# Altium PCB 最小系统.PcbDoc
Units mil, origin at the board's own origin, x right, y up, seen from the top; angles counter-clockwise.
Board outline 6000 x 4000 mil, 2 copper layers (Top Layer, Bottom Layer); 29 components, 12 nets, 110 pads, 0 vias.
Unrouted connection lines stored in the file: 1.
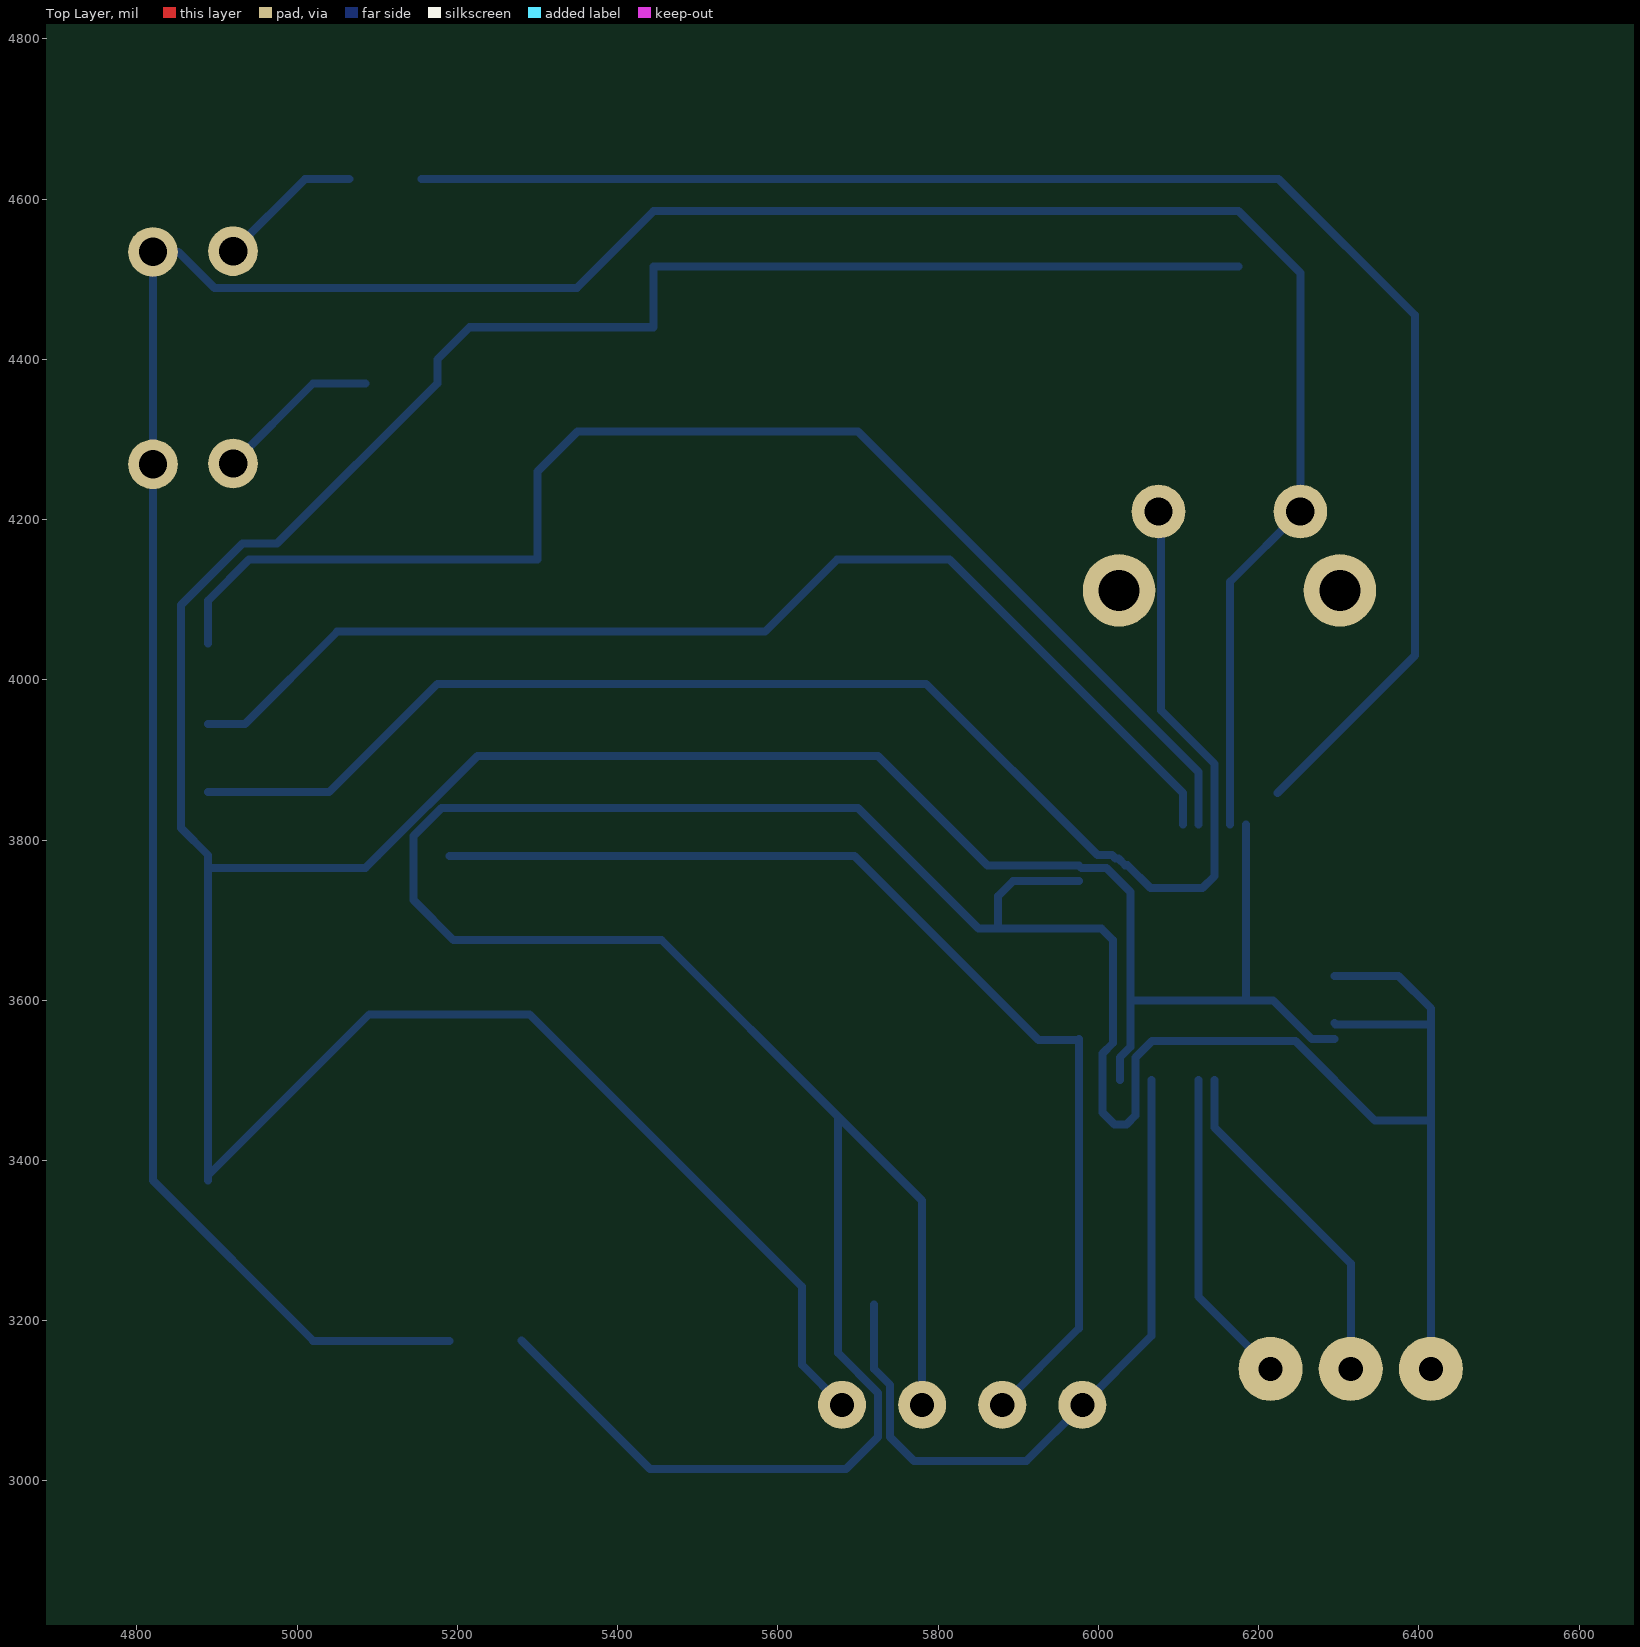
[diagram p0: Top Layer view]
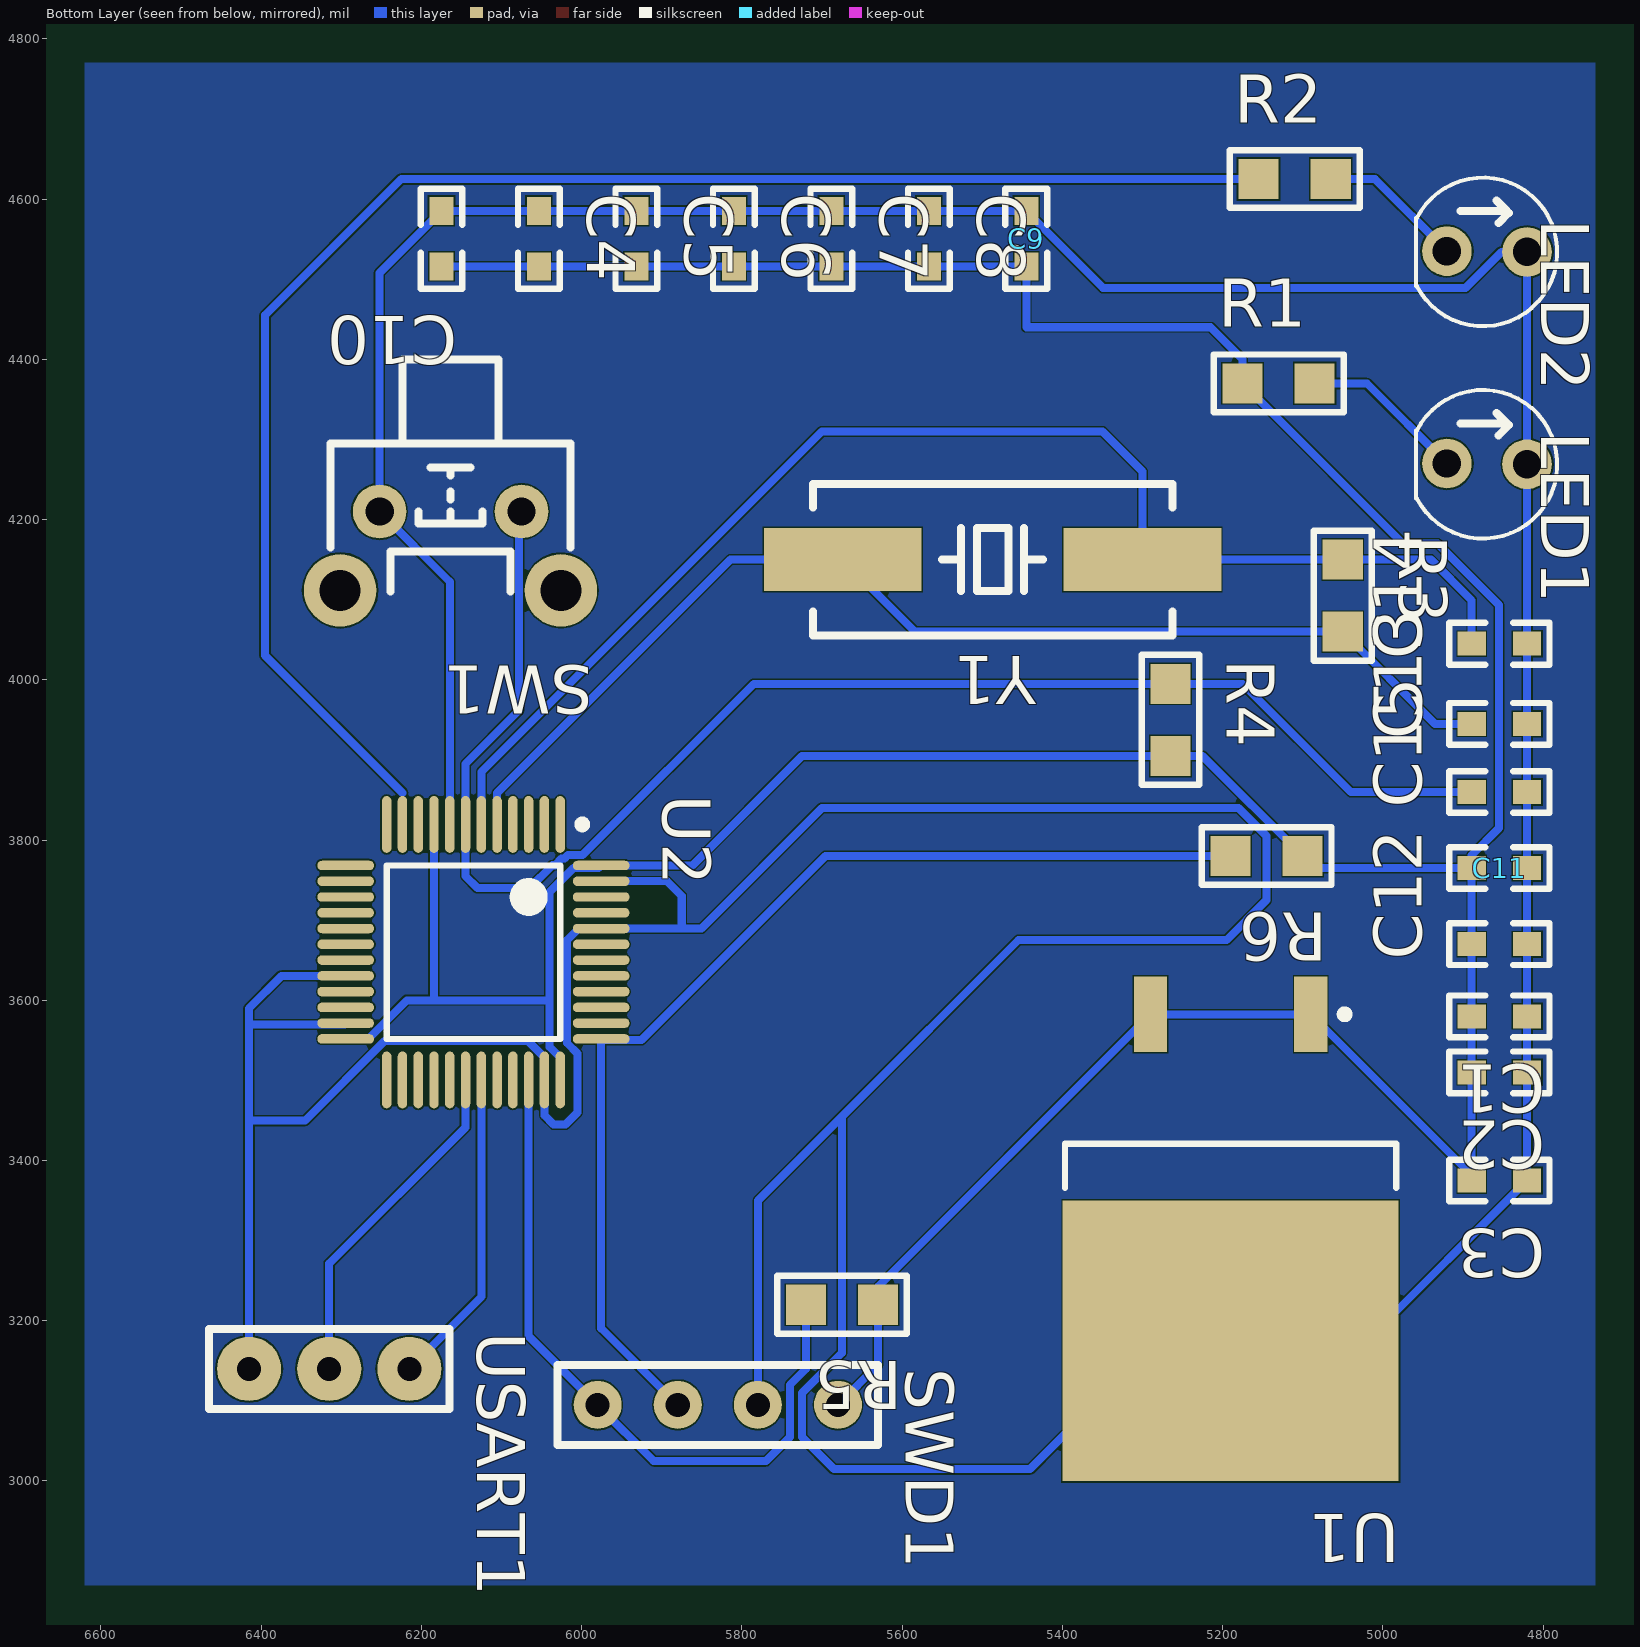
[diagram p1: Bottom Layer view, seen from below]
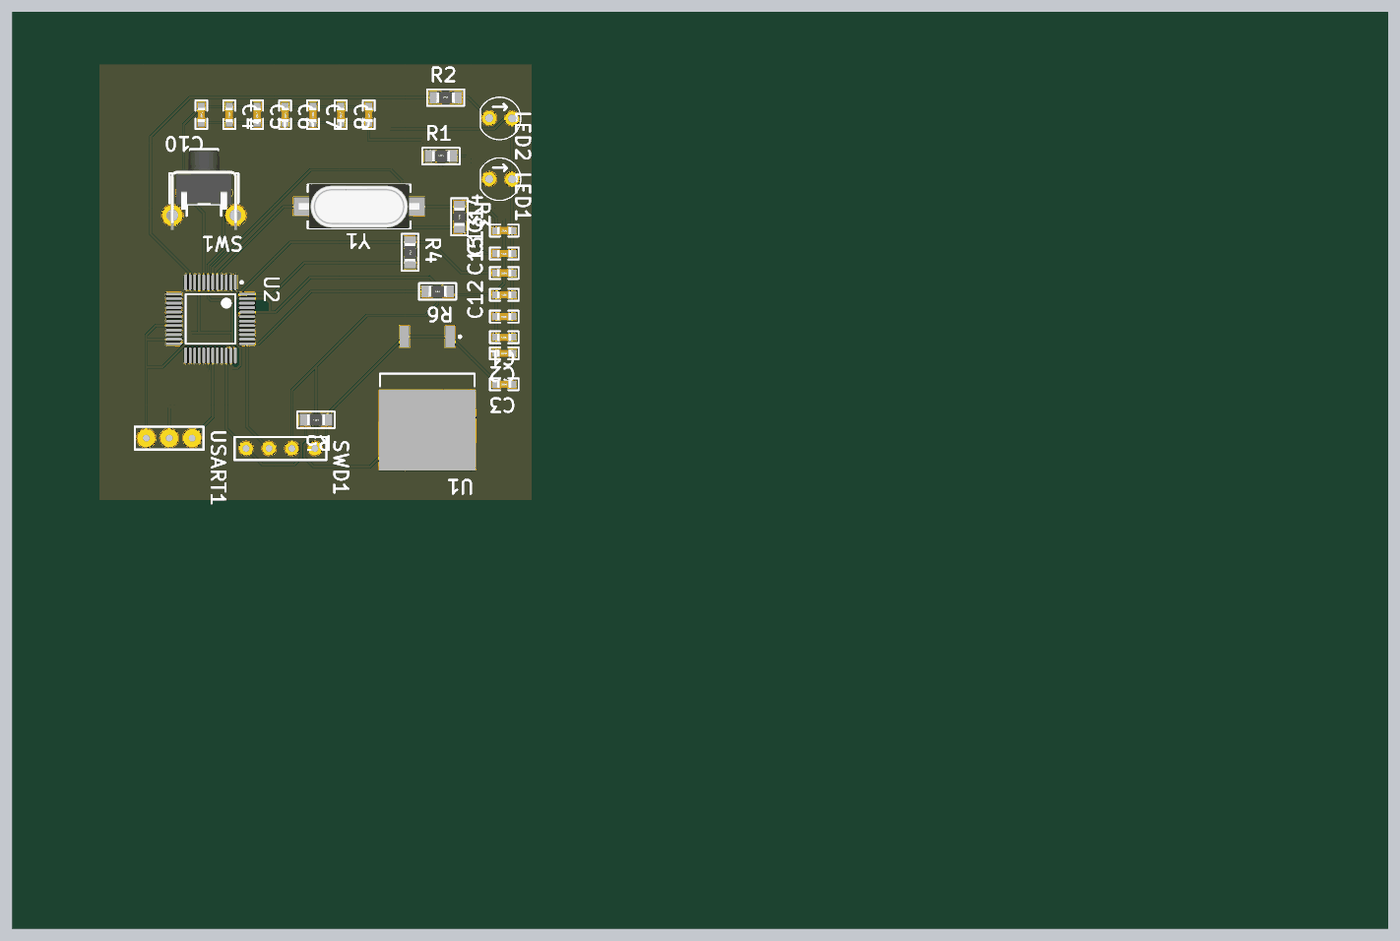
[diagram p2: 3D render of the assembled board from below, using the file's embedded part models]

## Layer stack, top to bottom
Top Solder: solder mask 0.4, Solder Resist, Dk 3.5
Top Layer: signal copper 1.4
Dielectric 1: dielectric 12.6, FR-4, Dk 4.8
Bottom Layer: signal copper 1.4
Bottom Solder: solder mask 0.4, Solder Resist, Dk 3.5

## Board outline
1000,1000 7000,1000 7000,5000 1000,5000

## Design rules (kind name [scope] priority, off if disabled: settings)
Clearance [All] p1: gap=2
PolygonConnect [All] p1: connectstyle=Relief reliefconductorwidth=10 reliefentries=4 polygonreliefangle="90 Angle" airgapwidth=10
RoutingVias [All] p1: holewidth=28 width=50 viastyle="Through Hole" minholewidth=28 minwidth=50 maxholewidth=28 maxwidth=50
SolderMaskExpansion [All] p1: expansion=4
Width [All] p1: maxlimit=10 minlimit=10 preferedwidth=10
30 further rules are at their usual default settings.

## Components (designator, comment, footprint, x,y, rotation, side; value= is the part's Value field where it differs from the comment)
C1 "104" "C 0603" 4855,3580 r0 bottom
C2 "104" "C 0603" 4855,3510 r0 bottom
C3 "104" "C 0603" 4855,3375 r0 bottom
C4 "104" "C 0603" 6053.33,4550 r270 bottom
C5 "104" "C 0603" 5931.67,4550 r270 bottom
C6 "104" "C 0603" 5810,4550 r270 bottom
C7 "104" "C 0603" 5688.33,4550 r270 bottom
C8 "104" "C 0603" 5566.67,4550 r270 bottom
C9 "104" "C 0603" 5445,4550 r270 bottom
C10 "104" "C 0603" 6175,4550 r270 bottom
C11 "104" "C 0603" 4855,3765 r0 bottom
C12 "104" "C 0603" 4855,3670 r0 bottom
C13 "104" "C 0603" 4855,3945 r0 bottom
C14 "104" "C 0603" 4855,4045 r0 bottom
C15 "104" "C 0603" 4855,3860 r0 bottom
LED1 "红色" LED 4920,4270 r180 bottom
LED2 "红色" LED 4920,4535 r180 bottom
R1 "1K" "R 0805" 5130,4370 r180 bottom
R2 "1K" "R 0805" 5110,4625 r180 bottom
R3 "1M" "R 0805" 5050,4105 r270 bottom
R4 "1K" "R 0805" 5265,3950 r270 bottom
R5 "1M" "R 0805" 5675,3220 r0 bottom
R6 "1M" "R 0805" 5145,3780 r0 bottom
SW1 "6x6x5" "TSW DIP-6*6*6_V" 6163.58,4210 r0 bottom
SWD1 "SWD" PCBComponent_1 6480,3195 r270 bottom
U1 "Volt Reg" D2PAK_N 5190,3314.76 r270 bottom
U2 "STM32F103C8T6" LQFP48_N 6135,3660 r270 bottom
USART1 "USART1" header3 6415,3140 r180 bottom
Y1 "XTAL" "XTAL-49S SMD" 5487.01,4150 r0 bottom

## Footprints (in the part's own frame and the unit in brackets; to place one, negate y for a bottom-side part, rotate by r counter-clockwise, add the part's x,y. Pads: shape width x height; smd on the part's side, far side on the other; paste and mask are expansions set on the pad)
"C 0603" [mil] "无极性贴片电容"
  rect 35x30 smd: 1(-35,0) 2(34,0)
  silkscreen extent -63,-26 62,26, body extent -31,-16 31,16, height 32
D2PAK_N [mm] "D2-PAK, 4-Leads, Body 8.8x10.4mm, Pitch 2.54mm, Lead Span 15.1mm, IPC Medium Density"
  rect 2.4x1.05 smd: 1(-6.8,2.54) 3(-6.8,-2.54)
  rect 8.9x10.65 smd: 2(3.55,0)
  silkscreen extent -6.92,-5.25 -1.3,5.25, body extent -2.7,-5.28 6.3,5.28, height 4.69
header3 [mil]
  round 80 hole 30: 1(0,0) 2(100,0) 3(200,0)
  silkscreen extent -50,-50 250,50
LED [mil]
  round 62 hole 35.43: 1(0,0) 2(100,-1)
  silkscreen extent -38,-94 138,92
LQFP48_N [mm] "Thin QFP, 48-Leads, Body 7x7mm, Pitch 0.5mm, IPC Medium Density"
  oval 1.8x0.3 smd: 1(-4.05,2.75) 2(-4.05,2.25) 3(-4.05,1.75) 4(-4.05,1.25) 5(-4.05,0.75) 6(-4.05,0.25) 7(-4.05,-0.25) 8(-4.05,-0.75) 9(-4.05,-1.25) 10(-4.05,-1.75) 11(-4.05,-2.25) 12(-4.05,-2.75) 25(4.05,-2.75) 26(4.05,-2.25) 27(4.05,-1.75) 28(4.05,-1.25) 29(4.05,-0.75) 30(4.05,-0.25) 31(4.05,0.25) 32(4.05,0.75) 33(4.05,1.25) 34(4.05,1.75) 35(4.05,2.25) 36(4.05,2.75)
  oval 0.3x1.8 smd: 13(-2.75,-4.05) 14(-2.25,-4.05) 15(-1.75,-4.05) 16(-1.25,-4.05) 17(-0.75,-4.05) 18(-0.25,-4.05) 19(0.25,-4.05) 20(0.75,-4.05) 21(1.25,-4.05) 22(1.75,-4.05) 23(2.25,-4.05) 24(2.75,-4.05) 37(2.75,4.05) 38(2.25,4.05) 39(1.75,4.05) 40(1.25,4.05) 41(0.75,4.05) 42(0.25,4.05) 43(-0.25,4.05) 44(-0.75,4.05) 45(-1.25,4.05) 46(-1.75,4.05) 47(-2.25,4.05) 48(-2.75,4.05)
  silkscreen extent -4.17,-2.75 2.75,3.57, body extent -3.5,-3.5 3.5,3.5, height 1.6
PCBComponent_1 [mil]
  round 60 hole 30: 1(100,800) 2(100,700) 3(100,600) 4(100,500)
  silkscreen extent 50,450 150,850
"R 0805" [mil] "1/8W贴片电阻"
  rect 50x50 smd: 1(-45,0) 2(45,0)
  silkscreen extent -81,-36 81,36, body extent -39,-25 39,25, height 20
"TSW DIP-6*6*6_V" [mm] "侧按轻触开关 6*6*6mm"
  round 2.3 hole 1.3: 0(-3.5,2.5) 0(3.5,2.5)
  round 1.7 hole 0.9: 1(-2.25,0) 2(2.25,0)
  silkscreen extent -3.81,-4.83 3.81,2.54, body extent -4.18,-4.72 4.18,4.13, height 7.47
"XTAL-49S SMD" [mm]
  rect 5x2 smd: 1(-4.75,0) 2(4.75,0)
  silkscreen extent -5.7,-2.4 5.7,2.4, body extent -6.7,-2.46 6.7,2.44, height 4

## Part data
C1 C2 C3 C4 C5 C6 C7 C8 C9 C10 C11 C12 C13 C14 C15: library part C, "无极性贴片电容"
LED1 LED2: library part LED-F234, "方形LED"
R1 R2 R3 R4 R5 R6: library part R, "贴片电阻"
SW1: library part "TSW DIP-6x6_V", "侧按直插6x6轻触开关"
SWD1: library part Component_1
U1: "Voltage Regulator"
U2: library part STM32F103C, "Low-density performance line, ARM-based 32-bit MCU with 16 or  32 KB Flash, USB, CAN, 6 timers, 2 ADCs, 6 com. interfaces"
USART1: library part "HEADER 3"
Y1: "Crystal Oscillator"

## Nets (pads, with @x,y where several pads share a name; then routed paths per layer and width w, separated by ;. In a path a pad name is that pad's centre, name@x,y a point inside that pad or via, vN(x,y) a via of type N, cw(c..) or ccw(c..) an arc to the next point about the centre after c; other vN are vias at no path point)
GND: C1.1 C2.1 C3.1 C4.1 C5.1 C6.1 C7.1 C8.1 C9.1 C10.1 C11.1 C12.1 C13.1 C14.1 C15.1 LED1.2 LED2.2 SW1.2 SWD1.2 U1.2 U2.8 U2.20 U2.23 U2.35 U2.44 U2.47 USART1.1 | length 8515.8
  Bottom Layer w10: U1.2 5020,3175 C3.1 C2.1 C1.1 C12.1 C11.1 C15.1 C13.1 C14.1 LED1.2 LED2.2 4851.91,4534 4896.91,4489 5349,4489 C9.1 C8.1 C7.1 C6.1 C5.1 C4.1 C10.1 6252.17,4507.83 SW1.2 6164.53,4122.36 U2.8 ; U1.2@5280,3175.24 5440.24,3015 5685,3015 5725,3055 5725,3110 5675,3160 5675,3455 ; SWD1.2@5775,3090 SWD1.2 5780,3350 5675,3455 ; 5875,3690 5875,3730 5893.58,3748.58 U2.47 ; U2.23 6295.87,3570 6415,3570 ; U2.20 6374.53,3630.47 6415,3590 6415,3570 ; USART1.1 6415,3450 ; 5675,3455 5455,3675 5195,3675 5145,3725 5145,3805 5180,3840 5700,3840 5850.47,3689.53 U2.44 6003.64,3689.53 6017.98,3675.19 6017.98,3546.39 6005,3533.4 6005,3460 6020,3445 6035,3445 6046.42,3456.42 U2.35 6046.42,3528.64 6066.8,3549.03 6245.97,3549.03 6345,3450 6415,3450 ; 6415,3450 6415,3570
IN: C13.2 R3.2 U2.5 Y1.2 | length 1461.4
  Bottom Layer w10: C13.2 4935,3945 R3.2 5584.01,4060 Y1.2 5814.33,4150 6105.47,3858.86 U2.5
LED: R2.1 U2.11 | length 1977.6
  Bottom Layer w10: R2.1 6225,4625 6395,4455 6395,4030.27 6223.58,3858.86
NetLED1_1: LED1.1 R1.2 | length 206.4
  Bottom Layer w10: LED1.1 5020,4370 R1.2
NetLED2_1: LED2.1 R2.2 | length 182.3
  Bottom Layer w10: LED2.1 5010,4625 R2.2
NRST: C15.2 R4.1 SW1.1 U2.7 | length 1907.6
  Bottom Layer w10: C15.2 5040,3860 5175,3995 R4.1 5785,3995 5998.83,3781.17 6017.23,3781.17 6021.39,3777.02 6024.95,3777.02 6033.46,3768.51 6036.49,3768.51 6065,3740 6130,3740 6144.84,3754.84 U2.7 6144.84,3895.16 6078.06,3961.94 6078.06,4206.94 SW1.1
OUT: C14.2 R3.1 U2.6 Y1.1 | length 1683.6
  Bottom Layer w10: C14.2 4889,4099 4940,4150 R3.1 Y1.1 5300,4260 5350,4310 5700.16,4310 6125.16,3885 U2.6
RX1: U2.31 USART1.3 | length 397.9
  Bottom Layer w10: U2.31 6125,3500.39 6125,3230 USART1.3
SWCLK: R6.2 SWD1.3 U2.37 | length 1377.4
  Bottom Layer w10: R6.2 5695.63,3780 5925.12,3550.51 5974.33,3550.51 U2.37 5975.55,3190.55 SWD1.3
SWDIO: R5.2 SWD1.4 U2.34 | length 895.9
  Bottom Layer w10: R5.2 5720,3140 5740,3120 5740,3055 5770,3025 5910,3025 SWD1.4 6066.1,3181.1 U2.34
TX1: U2.30 USART1.2 | length 431.2
  Bottom Layer w10: U2.30 6145.16,3500.24 6145.16,3452.86 6145,3452.7 6145,3441.3 6315,3271.3 USART1.2
VCC: C1.2 C2.2 C3.2 C4.2 C5.2 C6.2 C7.2 C8.2 C9.2 C10.2 C11.2 C12.2 R1.1 R4.2 R5.1 R6.1 SWD1.1 U1.1 U1.3 U2.1 U2.9 U2.24 U2.36 U2.48 | length 5436.1
  Bottom Layer w10: C3.2 C3.2@4889,3381.48 ; SWD1.1 5630,3145 R5.1 5630,3242.48 U1.3 U1.1 C3.2@4889,3381.48 ; U2.36 6026.73,3528.64 6040,3541.91 6040,3600 ; C10.2 C4.2 C5.2 C6.2 C7.2 C8.2 C9.2 5445,4440 5215,4440 5175,4400 R1.1 4975,4170 4931.72,4170 4855,4093.28 4855,3815 4889,3781 C11.2 ; U2.9 6184.21,3600 ; U2.24 6266.36,3551.73 6218.09,3600 6184.21,3600 ; C3.2@4889,3381.48 C2.2 C1.2 C12.2 C11.2 ; C11.2 5085,3765 R6.1 5225,3905 R4.2 5725,3905 5861.73,3768.27 U2.48 5978.8,3765.02 6002.19,3765.02 6009.98,3765.02 6040,3735 6040,3600 ; 6040,3600 6184.21,3600
pads on no net: SW1.0 U2.2 U2.3 U2.4 U2.10 U2.12 U2.13 U2.14 U2.15 U2.16 U2.17 U2.18 U2.19 U2.21 U2.22 U2.25 U2.26 U2.27 U2.28 U2.29 U2.32 U2.33 U2.38 U2.39 U2.40 U2.41 U2.42 U2.43 U2.45 U2.46

## Polygon pours and split planes (outlines as drawn)
no net on Bottom Layer "Bottom Layer-No Net" (solid, pour order 2): 4735,4770 4735,2870 6620,2870 6620,4770 4740,4770